# Altium PCB CNEPuckRevF.PcbDoc (part 2 of 2)
Units mil, origin at the board's own origin, x right, y up, seen from the top; angles counter-clockwise.
Board outline 3831.74 x 3902.47 mil, 4 copper layers (Top Layer, Internal Plane 1, Internal Plane 2, Bottom Layer); 165 components, 118 nets, 543 pads, 169 vias.
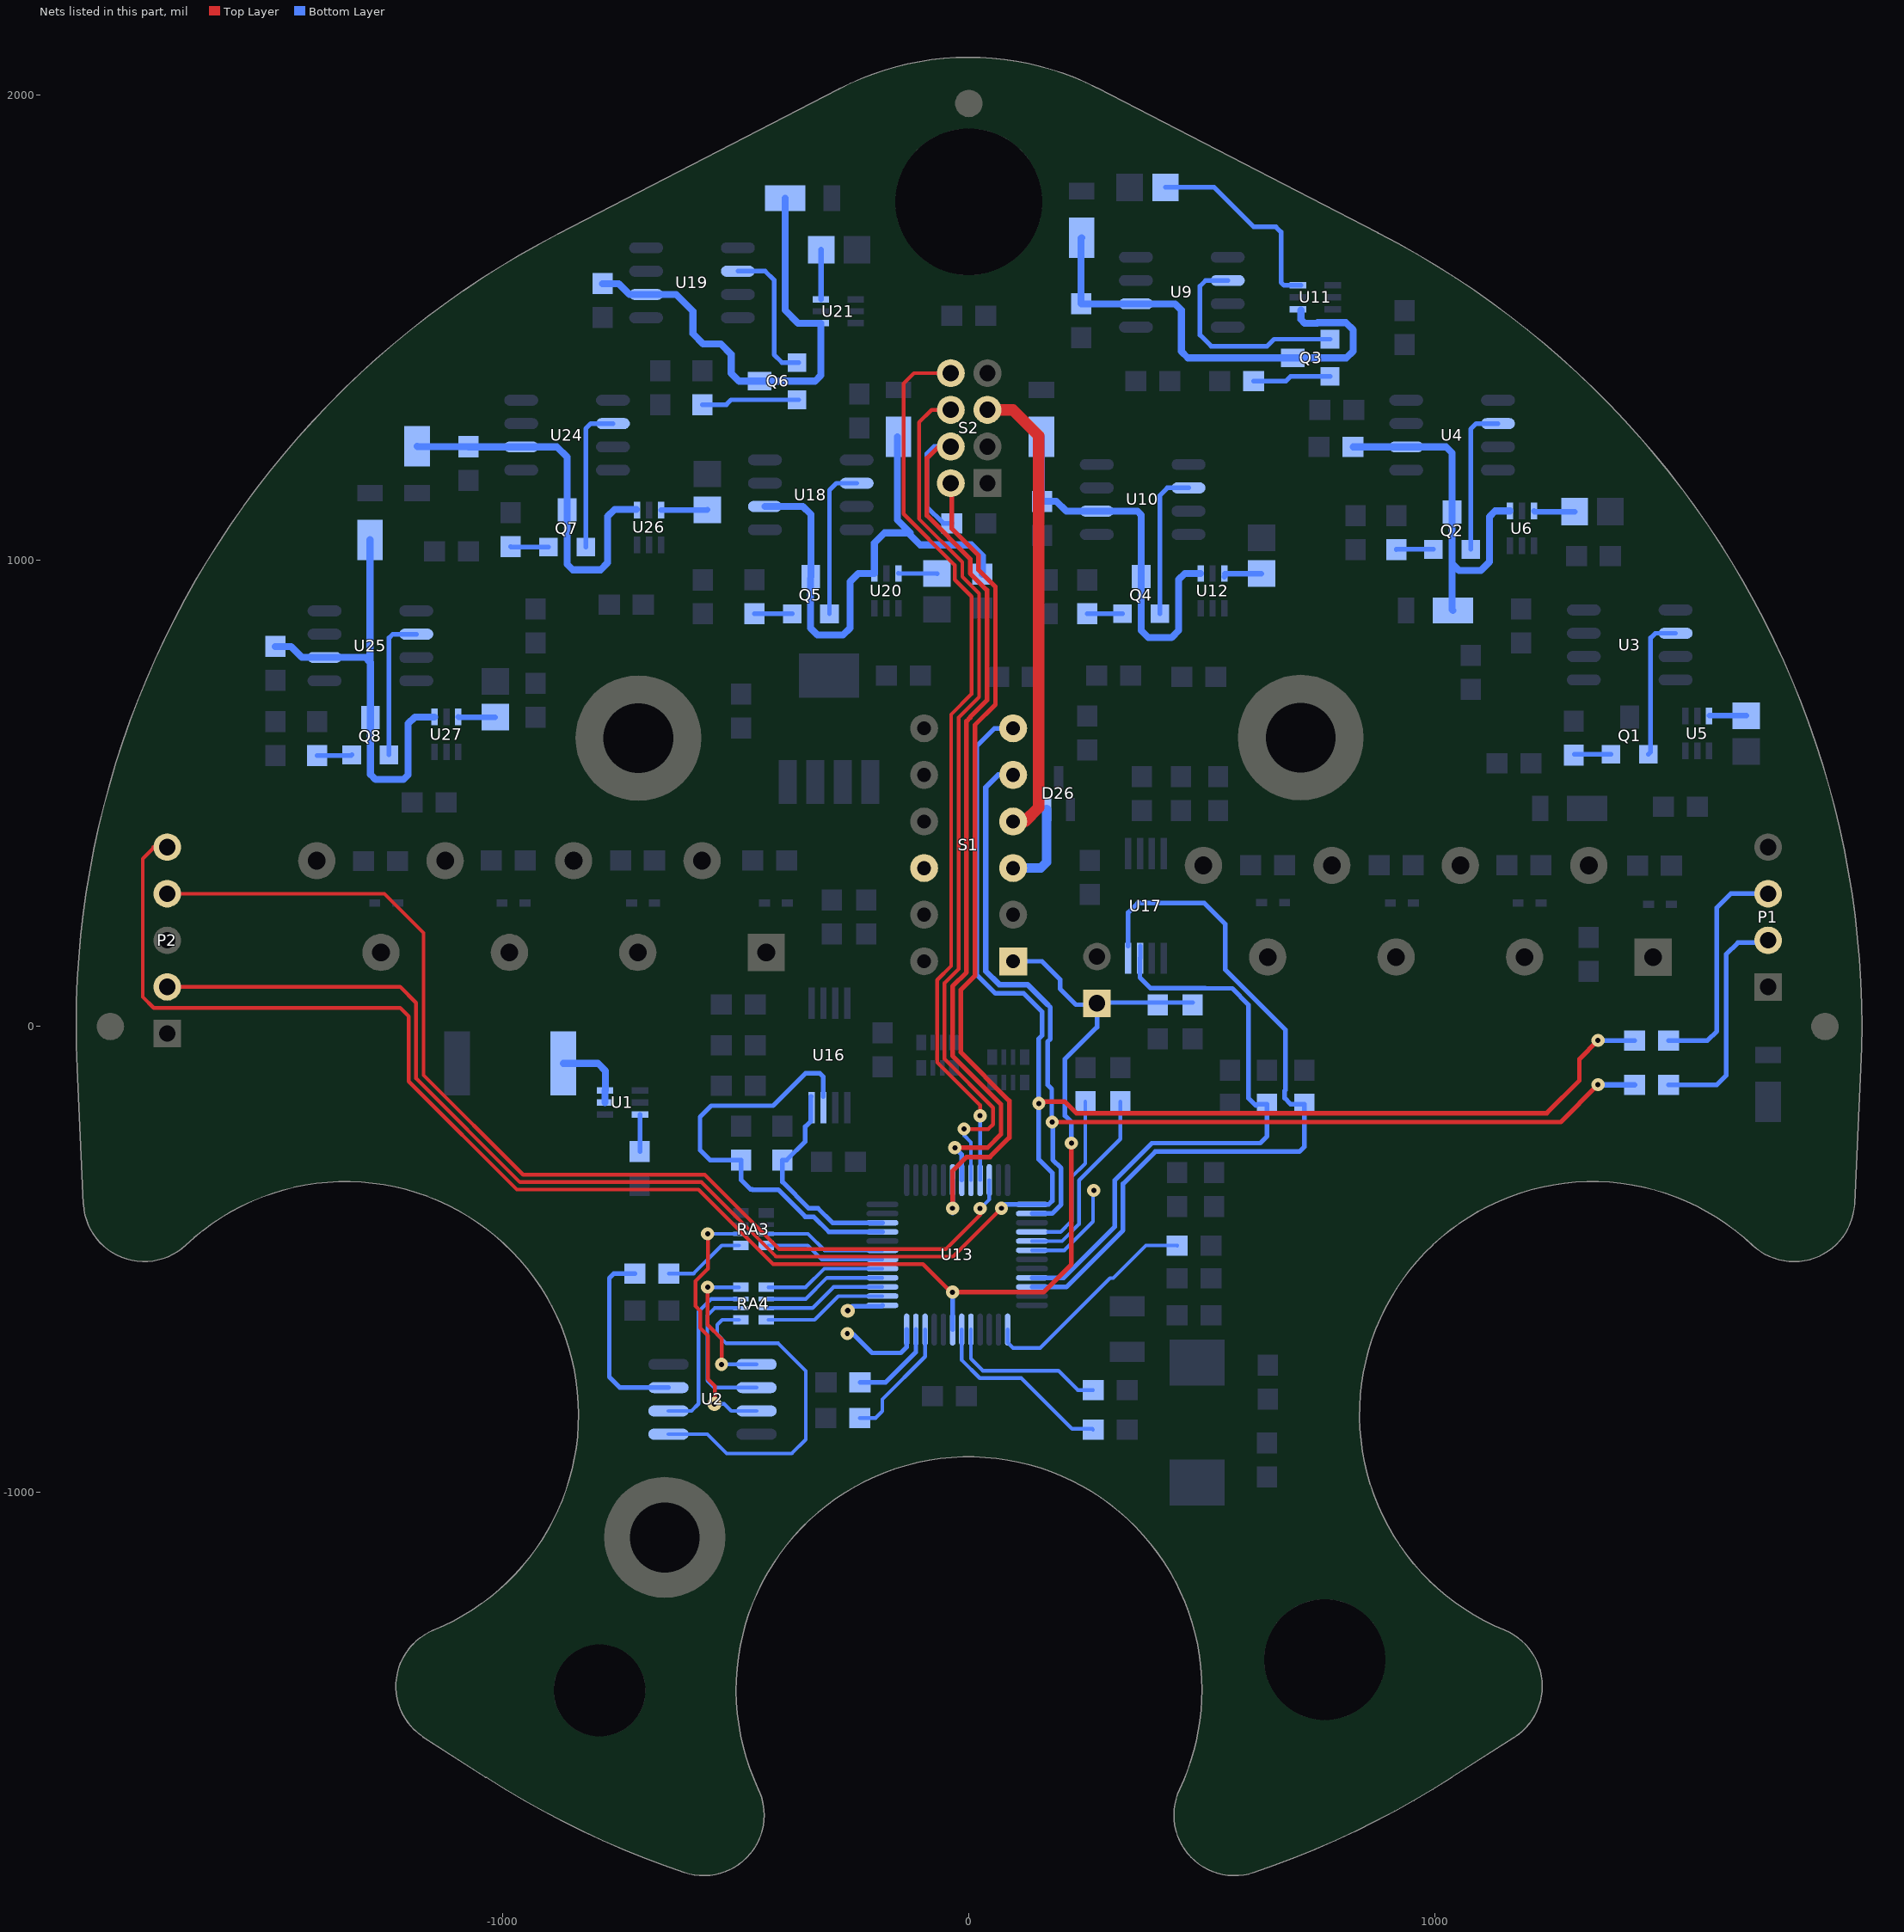
[diagram p4: the nets of this part, all layers, seen from the top]

## Via types
v1: diameter 28, hole 11, Top Layer to Bottom Layer, tented both sides, 158 vias
v2: diameter 30, hole 12, Top Layer to Bottom Layer, tented both sides, 6 vias
v3: diameter 50, hole 28, Top Layer to Bottom Layer, 4 vias
v4: diameter 28, hole 11, Top Layer to Bottom Layer, 1 vias

## Nets (pads, with @x,y where several pads share a name; then routed paths per layer and width w, separated by ;. In a path a pad name is that pad's centre, name@x,y a point inside that pad or via, vN(x,y) a via of type N, cw(c..) or ccw(c..) an arc to the next point about the centre after c; other vN are vias at no path point) (continued)
NetD19_2: D19.2 Q2.D R7.2 U4.2 U6.1 | length 796.8
  Bottom Layer w15: R7.2@824.42,1244 U4.2@938.57,1244 1024,1244 1037,1231 Q2.D@1037,1104 1037,994 ; D19.2@1038.42,893 1037,894.42 1037,994 ; U6.1@1161.41,1106.4 1129.4,1106.4 1117,1094 1117,997 1099,979 1052,979 1037,994
NetD20_2: D20.2 Q3.D R21.2 U9.2 U11.1 | length 1018.9
  Bottom Layer w15: D20.2@242,1692.58 241,1691.58 R21.2@241,1551.42 241.42,1551 U9.2@358.57,1551 443,1551 456,1538 456,1449 470,1435 Q3.D@695,1435 810,1435 824.42,1449.42 824.42,1494.99 808.91,1510.5 748.58,1510.5 747.49,1509.41 720.59,1509.41 712.6,1517.4 U11.1@712.6,1537.4
NetD21_2: D21.2 Q4.D R31.2 U10.2 U12.1 | length 866.2
  Bottom Layer w15: D21.2@156,1265.58 156,1128.42 157,1127.42 187.58,1127.42 209,1106 U10.2@274.57,1106 362,1106 370,1098 Q4.D@370,966 370,850 385,835 435,835 450,850 450,959 463.4,972.4 U12.1@497.41,972.4
NetD22_2: D22.2 Q5.D R37.2 U18.2 U20.1 | length 1190.6
  Bottom Layer w15: U18.2@-437.43,1116 -356,1116 -339,1099 Q5.D@-339,965.61 ; Q5.D@-340,961.61 -340,855 -325,840 -270,840 -255,855 -255,955 -237.57,972.43 U20.1@-202.59,972.43 -202.59,1037.93 -181.02,1059.5 -130,1059.5 ; D22.2@-153,1265.58 -153,1087 -125.5,1059.5 -130,1059.5 ; R37.2@29,970.42 29,1010 5.4,1033.6 -104.1,1033.6 -130,1059.5
NetD23_2: D23.2 Q6.D R32.2 U19.2 U21.1 | length 1053.7
  Bottom Layer w15: R32.2@-786,1594.42 -751.42,1594.42 -728,1571 U19.2@-692.43,1571 -628,1571 -592,1535 -592,1487 -570,1465 -532,1465 -510,1443 -510,1402 -493,1385 Q6.D@-449,1385 -330,1385 -317.4,1397.6 U21.1@-317.4,1509.41 -366.41,1509.41 -394.42,1537.42 D23.2@-394.42,1778
NetD24_2: D24.2 Q7.D R38.2 U24.2 U26.1 | length 827.9
  Bottom Layer w15: D24.2@-1184,1245.42 -1183,1244.42 R38.2@-1074,1244.42 -1073.58,1244 U24.2@-960.43,1244 -884,1244 -862,1222 -862,992 -850,980 -790,980 -775,995 -775,1095 -760,1110 U26.1@-713.19,1110
NetD25_2: D25.2 Q8.D R43.2 U25.2 U27.1 | length 982.9
  Bottom Layer w15: R43.2@-1488,815.42 -1454.42,815.42 -1431,792 U25.2@-1382.43,792 -1295,792 -1285,782 ; D25.2@-1285,1044.58 -1285,782 ; U27.1@-1146.59,664.4 -1188.6,664.4 -1203,650 -1203,540 -1213,530 -1273,530 -1284,541 Q8.D@-1284,663 -1284,781 -1285,782
NetP1_2: P1.2 R28.1 | length 494.3
  Bottom Layer w10: R28.1@1501.42,-125 1605,-125 1625,-105 1625,155 1650,180 1710,180 P1.2@1715,185
NetP1_3: P1.3 R26.1 | length 499.3
  Bottom Layer w10: R26.1@1501.42,-30 1585,-30 1605,-10 1605,255 1635,285 P1.3@1715,285
NetQ1_G: Q1.G U3.6 | length 309.6
  Bottom Layer w10: Q1.G@1458,584 1463,589 1463,834 1473,844 U3.6@1516.43,844
NetQ1_S: Q1.S R3.2 | length 78.6
  Bottom Layer w10: R3.2@1299.42,584 Q1.S@1378,584
NetQ2_G: Q2.G U4.6 | length 321.4
  Bottom Layer w10: Q2.G@1077,1024 1077,1282 1089,1294 U4.6@1135.43,1294
NetQ2_S: Q2.S R4.2 | length 80.2
  Bottom Layer w10: R4.2@917,1023.58 917.42,1024 Q2.S@997,1024
NetQ3_G: Q3.G U9.6 | length 464.6
  Bottom Layer w10: U9.6@555.43,1601 508,1601 496,1589 496,1484 520,1460 640,1460 655,1475 Q3.G@775,1475
NetQ3_S: Q3.S R9.2 | length 167.7
  Bottom Layer w10: R9.2@611.42,1385 680,1385 690,1395 Q3.S@775,1395
NetQ4_G: Q4.G U10.6 | length 322.1
  Bottom Layer w10: Q4.G@410,886 410,1140 426,1156 U10.6@471.43,1156
NetQ4_S: Q4.S R10.2 | length 76.2
  Bottom Layer w10: R10.2@254,885.58 254.42,886 Q4.S@330,886
NetQ5_G: Q5.G U18.6 | length 330
  Bottom Layer w10: Q5.G@-299,885.61 -299,1151 -284,1166 U18.6@-240.57,1166
NetQ5_S: Q5.S R33.2 | length 81.1
  Bottom Layer w10: R33.2@-460,885.89 -459.72,885.61 Q5.S@-379,885.61
NetQ6_G: Q6.G U19.6 | length 305.5
  Bottom Layer w10: U19.6@-495.57,1621 -437,1621 -418,1602 -418,1442 -401,1425 Q6.G@-365,1425
NetQ6_S: Q6.S R34.2 | length 211.3
  Bottom Layer w10: R34.2@-572,1334.58 -520.42,1334.58 -510,1345 Q6.S@-365,1345
NetQ7_G: Q7.G U24.6 | length 317
  Bottom Layer w10: Q7.G@-822,1029 -822,1283 -811,1294 U24.6@-763.57,1294
NetQ7_S: Q7.S R39.2 | length 81.2
  Bottom Layer w10: R39.2@-983,1029.58 -982.42,1029 Q7.S@-902,1029
NetQ8_G: Q8.G U25.6 | length 312.7
  Bottom Layer w10: Q8.G@-1244,583 -1244,834 -1236,842 U25.6@-1185.57,842
NetQ8_S: Q8.S R40.2 | length 74.6
  Bottom Layer w10: R40.2@-1398,581.58 -1325.42,581.58 Q8.S@-1324,583
NetR1_2: R1.2 U1.6 | length 80
  Bottom Layer w10: R1.2@-705.6,-268.58 U1.6@-705.6,-188.59
NetR2_1: R2.1 U1.2 U1.3 | length 164.9
  Bottom Layer w15: R2.1@-869.83,-79 -795.83,-79 -779.83,-95 -779.83,-136.83 U1.3@-780.4,-137.41 U1.2@-780.4,-163
NetR5_1: R5.1 U5.3 | length 78.8
  Bottom Layer w12: U5.3@1589.19,667 R5.1@1668,667
NetR6_1: R6.1 U6.3 | length 88
  Bottom Layer w12: U6.3@1212.59,1106.4 1213.99,1105 R6.1@1300,1105
NetR11_1: R11.1 U11.3 | length 441
  Bottom Layer w10: R11.1@422,1801 526.54,1801 611.27,1716.27 658.73,1716.27 670,1705 670,1597 676.41,1590.59 U11.3@712.6,1590.59
NetR12_1: R12.1 U12.3 | length 79.7
  Bottom Layer w12: U12.3@548.59,965.4 U12.3@549.19,966 ; U12.3@549.19,972 R12.1@628,972
NetR13_2: R13.2 U13.46 U17.4 | length 1641.7
  Bottom Layer w10: U13.46@135.43,-558.9 209.23,-558.9 330.85,-437.27 330.85,-337.55 400,-268.41 709.35,-268.41 720,-257.76 R13.2@720,-166.42 690.4,-166.42 677.61,-153.62 677.61,-137.94 679.12,-136.42 679.12,-6.8 550,122.33 550.04,122.37 550.04,220 505.04,265 362.2,265 341.73,244.53 341.73,173.05 U17.4@341.92,172.86
NetR14_2: R14.2 U13.45 U17.3 | length 1331.3
  Bottom Layer w10: U13.45@135.43,-539.21 203.46,-539.21 312.85,-429.82 312.85,-330.1 392.75,-250.21 625,-250.21 640,-235.21 R14.2@640,-166.42 619.96,-166.42 616.38,-170 600,-153.62 600,46.87 565,81.87 507.22,81.87 507.04,82.06 390,82.06 367.13,104.93 U17.3@367.13,146.65 ; U17.3@367.92,146.65 U17.3@367.92,172.86
NetR15_2: R15.2 U13.22 U16.4 | length 465.5
  Bottom Layer w10: U16.4@-338.39,-149.87 -339,-150.48 -339,-202.84 -351.07,-214.9 -351.07,-246.81 -390.88,-286.62 R15.2@-400,-286.62 -400,-333.71 -343.61,-390.1 -323.5,-390.1 -292.5,-421.1 U13.22@-185.43,-421.1
NetR16_2: R16.2 U13.21 U16.3 | length 908.8
  Bottom Layer w10: U16.3@-312.8,-149.87 -312.8,-107.2 -320,-100 -350,-100 -420,-170 -552.75,-170 -576.7,-193.95 -576.7,-265.11 -555.19,-286.62 R16.2@-488.42,-286.62 -488.42,-329.57 -468.8,-349.18 -464.79,-349.18 -463.81,-350.16 -409,-350.16 -351.07,-408.1 -332.96,-408.1 -300.27,-440.79 U13.21@-185.43,-440.79
NetR27_2: R27.2 U13.5 | length 352.4
  Bottom Layer w8: U13.5@4.53,-650.43 4.53,-713.06 30,-738.53 192.11,-738.53 233.58,-780 R27.2@266.59,-780
NetR29_1: R29.1 U13.6 | length 409
  Bottom Layer w8: U13.6@-15.16,-650.43 -15.16,-716 23.37,-754.53 112.53,-754.53 221.62,-863.62 265.22,-863.62 R29.1@266.59,-865
NetR30_1: R30.1 U13.1 | length 487.9
  Bottom Layer w8: U13.1@83.27,-650.43 83.27,-678.27 95,-690 153.08,-690 303.08,-540 309.88,-540 380,-469.88 447.09,-469.88 R30.1@447.2,-470
NetR35_1: R35.1 U20.3 | length 83.4
  Bottom Layer w10: U20.3@-151.41,972.43 R35.1@-68,972
NetR36_2: R36.2 U21.3 | length 106.7
  Bottom Layer w12: U21.3@-317.4,1560.59 -317.4,1666.37 R36.2@-316.77,1667
NetR41_1: R41.1 U26.3 | length 99.7
  Bottom Layer w12: U26.3@-660.41,1108.4 -561.6,1108.4 R41.1@-561,1109
NetR42_1: R42.1 U27.3 | length 79.6
  Bottom Layer w12: U27.3@-1095.41,664.4 -1095.01,664 R42.1@-1016,664
NetR44_2: R44.2 U2.3 | length 407.7
  Bottom Layer w10: R44.2@-716.42,-530 -761.42,-530 -771.42,-540 -771.42,-752.17 -748.58,-775 U2.3@-644.49,-775
NetRA3_3: RA3.3 U13.19 | length 259.2
  Bottom Layer w8: RA3.3@-430,-444.78 -345.2,-444.78 -309.83,-480.16 U13.19@-185.43,-480.16
NetRA3_4: RA3.4 U13.18 | length 257
  Bottom Layer w8: RA3.4@-430,-469.88 -345.56,-469.88 -315.6,-499.84 U13.18@-185.43,-499.84
NetRA4_1: RA4.1 U13.17 | length 261.1
  Bottom Layer w8: RA4.1@-430,-559.53 -350.19,-559.53 -310.19,-519.53 U13.17@-185.43,-519.53
NetRA4_2: RA4.2 U13.16 | length 263.4
  Bottom Layer w8: RA4.2@-430,-584.63 -349.83,-584.63 -304.41,-539.21 U13.16@-185.43,-539.21
NetRA4_3: RA4.3 U13.15 | length 263.4
  Bottom Layer w8: RA4.3@-430,-604.31 -335.41,-604.31 -290,-558.9 U13.15@-185.43,-558.9
NetRA4_4: RA4.4 U13.14 | length 265.6
  Bottom Layer w8: RA4.4@-430,-629.41 -330.83,-629.41 -280,-578.58 U13.14@-185.43,-578.58
NHOLD: RA3.6 U2.7 | length 558.3
  Top Layer w8: v1(-560.53,-444.78) -560,-445.31 -560,-520 -586.53,-546.53 -586.53,-600 -576.53,-610 -576.53,-646.55 -560,-663.08 -560,-756.42 -545,-771.42 -545,-809 v2(-546,-810)
  Bottom Layer w8: v1(-560.53,-444.78) RA3.6@-492.99,-444.78 ; v2(-546,-810) -525,-810 -510,-825 U2.7@-455.51,-825
NRESET_CNE: C8.2 P2.5 P3.1 R25.2 S1.1 U13.7 | length 3806
  Top Layer w8: -1750,385 -1750,382.48 -1772.48,360 -1772.48,63.45 -1749.03,40 -1220,40 -1220,39.77 -1202,21.77 -1202,-117.75 -969.75,-350 -580,-350 -420,-510 -98.52,-510 -38.52,-570 v1(-34.84,-570)
  Top Layer w10: v1(-34.84,-570) 160,-570 220,-510 v1(220,-250)
  Bottom Layer w10: U13.7@-34.84,-650.43 v1(-34.84,-570) ; S1.1@95,140 157.06,140 195.87,101.19 195.87,81 230,46.87 270.45,46.87 P3.1@274,50.42 ; v1(220,-250) 220,-205.41 206.1,-191.51 206.1,-69.8 273.8,-2.1 275,-2.1 275,49.42 P3.1@274,50.42 ; C8.2@480,51.42 403.58,51.42 275,51.42 P3.1@274,50.42
NWRITEPROTECT: R44.1 RA3.5 | length 175.5
  Bottom Layer w8: R44.1@-643.58,-530 -590.46,-530 -530.34,-469.88 RA3.5@-492.99,-469.88
POWER_IN: S1.7 S2.5 | length 998.4
  Top Layer w25: S2.5@40,1323.48 94.52,1323.48 150,1268 150,470 120,440 S1.7@95,440
SPARE_2: U13.42 | length 223.9
  Bottom Layer w8: U13.42@135.43,-480.16 205.06,-480.16 266.59,-418.62 266.59,-353.41 v4(268,-352)
SPARE_3: U13.12 | length 187.3
  Bottom Layer w10: v1(-260.81,-659.19) -260,-660 -248.27,-660 -207.8,-700.47 -145.88,-700.47 -133.27,-687.86 U13.12@-133.27,-650.43
SPARE_4: U13.13 | length 79.4
  Bottom Layer w10: v2(-260,-610) -250,-600 -187.17,-600 U13.13@-185.43,-598.27
SPI1_MISO: RA4.7 U2.2 | length 367.1
  Bottom Layer w8: U2.2@-644.49,-825 -595,-825 -580,-810 -580,-611.88 -552.75,-584.63 RA4.7@-492.99,-584.63
SPI1_MOSI: RA4.8 U2.5 | length 321.1
  Top Layer w8: v1(-560.53,-559.53) -560.53,-639.93 -530.46,-670 v1(-530.46,-725)
  Bottom Layer w8: v1@-561,-560 v1(-560.53,-559.53) RA4.8@-492.99,-559.53 ; v1(-530.46,-725) U2.5@-455.51,-725
SPI1_NSS: RA4.5 U2.1 | length 766
  Bottom Layer w8: U2.1@-644.49,-875 -561,-875 -519.58,-916.42 -380,-916.42 -349.83,-886.25 -349.83,-739.17 -409,-680 -520.46,-680 -540,-660.46 -540,-640 -529.41,-629.41 RA4.5@-492.99,-629.41
SPI1_SCK: RA4.6 U2.6 | length 326.2
  Bottom Layer w8: RA4.6@-492.99,-604.31 -545.31,-604.31 -561,-620 -561,-760 -546,-775 U2.6@-455.51,-775
SWDAT: P2.4 U13.34 | length 2352.4
  Top Layer w8: P2.4@-1720,285 -1254.04,285 -1170,200.96 -1170,-104.5 -956.5,-318 -566.75,-318 -407.01,-477.74 -49.23,-477.74 24.21,-404.3 v1(24.21,-390.67)
  Bottom Layer w8: v1(24.21,-390.67) 43.9,-370.99 U13.34@43.9,-329.57
USART1_CTS: S2.6 U13.32 | length 1894.8
  Top Layer w8: S2.6@-38.74,1323.48 -80,1323.48 -107,1296.48 -107,1089.63 -14,996.63 -14,965.5 22,929.5 22,707.04 -22,663.04 -22,123.37 -52,93.37 -52,-70 52,-174 52,-210 42,-220 v1(-10,-220)
  Bottom Layer w8: v1(-10,-220) -10,-233.85 4.53,-248.38 U13.32@4.53,-329.57
USART1_RTS: S2.8 U13.33 | length 1949.4
  Top Layer w8: S2.8@-38.74,1402.22 -117.78,1402.22 -140,1380 -140,1100 -30,990 -30,958.88 6,922.88 6,713.67 -38,669.67 -38,130 -68,100 -68,-76.62 24.21,-168.84 v1(24.21,-191.51)
  Bottom Layer w8: U13.33@24.21,-329.57 v1(24.21,-191.51)
USART1_RXD: R18.2 S2.4 U13.31 | length 2040.3
  Top Layer w10: S2.4@-65,1244.74 -90,1219.74 -90,1096.67 3,1003.67 3,972.54 39,936.54 39,700 3,664 3,663 -5,655 -5,116.33 -35,86.33 -35,-62.96 69,-166.96 69,-231 40,-260 v1(-30,-260)
  Bottom Layer w10: S2.4@-38.74,1244.74 -39,1245 -74.21,1245 -90.23,1228.99 -90.23,1115.43 -54.8,1080 R18.2@-36.42,1080 ; v1(-30,-260) -15.16,-274.84 U13.31@-15.16,-329.57
USART1_TXD: S2.2 U13.30 | length 1819.8
  Top Layer w10: S2.2@-38.74,1166 -36.44,1163.7 -36.44,1068.56 21,1011.12 21,980 57,944 57,691 13,647 13,108.88 -17,78.88 -17,-55.5 87,-159.5 87,-238.46 45.46,-280 -4.84,-280 -34.84,-310 v1(-34.84,-390)
  Bottom Layer w10: v1@-34.84,-400 v1(-34.84,-390) U13.30@-34.84,-329.57
USART2_RXD: R28.2 S1.9 U13.38 | length 2394.2
  Top Layer w10: v1(178.58,-205) 1270,-205 v1(1350,-125)
  Bottom Layer w10: U13.38@135.43,-401.42 178.58,-401.42 197.94,-382.06 197.94,-303.77 180,-285.83 v1@180,-206.42 ; 169,46.87 175,40.87 175,-26.77 169,-32.77 169,-125 178,-134 v1@178,-204.42
  Bottom Layer w12: 63.22,540 36.42,513.2 36.42,118.78 65.2,90 125.87,90 169,46.87 ; v1@178,-204.42 v1(178.58,-205) v1@180,-206.42 ; v1(1350,-125) R28.2@1428.58,-125
USART2_TXD_SWCLK: P2.2 R26.2 S1.11 U13.37 | length 4837.7
  Top Layer w8: P2.2@-1720,85 -1220,85 -1186,51 -1186,-111.12 -963.12,-334 -573.37,-334 -413.63,-493.74 -33.74,-493.74 v1(70,-390)
  Top Layer w10: v1@154,-161 205.59,-161 230.59,-186 1240,-186 1310,-116 1310,-70 v1(1350,-30)
  Bottom Layer w10: v1(70,-390) 78.27,-381.73 U13.37@135.43,-381.73 171.4,-381.73 178.94,-374.19 178.94,-313.94 150,-285 v1(150,-165) 150,-26.32 157,-19.32 157,32 118,71 57.33,71 17.42,110.91 17.42,602.42 55,640 S1.11@95,640 ; v1(1350,-30) R26.2@1428.58,-30
VBAT_SENSE: S1.6
VBAT_SW_SENSE: D26.2 S1.5 | length 190.2
  Bottom Layer w20: S1.5@95,340 154.42,340 167.03,352.61 D26.2@167.03,465.55
VER1: R23.1 U13.10 | length 267.6
  Bottom Layer w8: R23.1@-234.05,-840 -200,-840 -185.43,-825.43 -185.43,-800 -93.9,-708.46 U13.10@-93.9,-650.43
VER2: R24.1 U13.11 | length 195.2
  Bottom Layer w10: R24.1@-233.58,-763.58 -178.37,-763.58 -113.58,-698.8 U13.11@-113.58,-650.43
VER3: R20.1 U13.41 | length 415.4
  Bottom Layer w8: U13.41@135.43,-460.47 200,-460.47 236.61,-423.86 236.61,-330 325,-241.61 R20.1@325,-161.42
VER4: R22.1 U13.40 | length 328.4
  Bottom Layer w8: 170,-440.79 197.06,-440.79 220.61,-417.24 220.61,-323.37 250,-293.98 R22.1@250,-161.42
pads on no net: FD1.0 FD2.0 FD3.0 RA2.4 RA2.5 RA3.1 RA3.8 S1.4 U14.2

## Polygon pours and split planes (outlines as drawn)
GND on Top Layer "Top GND" (solid, remove dead copper, pour order 6): -1172.24,-1529.57 -1037.26,-1616.23 -1037.24,-1616.24 ccw(c0.48,0.2) -612.24,-1820.33 ccw(c-569.13,-1692.27) -434.01,-1692.27 ccw(c-569.13,-1692.27) -446.95,-1634.57 cw(c0.48,-1423.3) -446.96,-1634.55 cw(c0.48,-1423.3) 495.28,-1423.3 cw(c0.48,-1423.3) 447.91,-1634.57 ccw(c570.1,-1692.27) 613.2,-1820.33 ccw(c0.48,0.2) 1038.21,-1616.24 1173.2,-1529.57 ccw(c1100.21,-1415.87) 1235.33,-1415.87 ccw(c1100.21,-1415.87) 1151.25,-1290.76 cw(c1338.18,-832.62) 1151.23,-1290.75 cw(c1338.18,-832.62) 1622.23,-427.48 cw(c1338.18,-832.62) 1677.78,-472.77 cw(c1338.18,-832.62) 1677.8,-472.79 ccw(c1770.55,-374.52) 1905.52,-380.89 1919.22,-90.28 ccw(c1916.71,-90.15) 1919.22,-90.27 ccw(c0.48,0.2) 1921.36,0.2 ccw(c0.48,0.2) 881.5,1707.12 281.02,2017.06 281,2017.06 cw(c279.85,2014.83) 281.02,2017.06 281,2017.06 ccw(c0.48,1473.57) -280.04,2017.06 ccw(c-278.89,2014.83) -280.06,2017.06 -280.04,2017.06 -280.06,2017.06 -880.54,1707.12 ccw(c0.48,0.2) -1918.26,-90.27 ccw(c-1915.75,-90.15) -1918.26,-90.29 -1918.26,-90.27 ccw(c-1915.75,-90.15) -1918.26,-90.27 -1918.26,-90.29 -1904.56,-380.89 ccw(c-1902.05,-380.77) -1904.56,-380.89 ccw(c-1769.59,-374.52) -1676.84,-472.79 cw(c-1337.22,-832.62) -1676.82,-472.77 cw(c-1337.22,-832.62) -1621.26,-427.48 cw(c-1337.22,-832.62) -842.42,-832.62 cw(c-1337.22,-832.62) -1150.27,-1290.75 cw(c-1337.22,-832.62) -1150.29,-1290.76 cw(c-1149.34,-1293.08) -1150.27,-1290.75 -1150.29,-1290.76 ccw(c-1099.25,-1415.87)
GND on Bottom Layer "Bottom GND" (solid, remove dead copper, pour order 8): -1172.24,-1529.57 -1037.26,-1616.23 -1037.24,-1616.24 ccw(c0.48,0.2) -612.24,-1820.33 ccw(c-569.13,-1692.27) -434.01,-1692.27 ccw(c-569.13,-1692.27) -446.95,-1634.57 cw(c0.48,-1423.3) -446.96,-1634.55 cw(c0.48,-1423.3) 495.28,-1423.3 cw(c0.48,-1423.3) 447.91,-1634.57 ccw(c570.1,-1692.27) 613.2,-1820.33 ccw(c0.48,0.2) 1038.21,-1616.24 1173.2,-1529.57 ccw(c1100.21,-1415.87) 1235.33,-1415.87 ccw(c1100.21,-1415.87) 1151.25,-1290.76 cw(c1338.18,-832.62) 1151.23,-1290.75 cw(c1338.18,-832.62) 1622.23,-427.48 cw(c1338.18,-832.62) 1677.78,-472.77 cw(c1338.18,-832.62) 1677.8,-472.79 ccw(c1770.55,-374.52) 1905.52,-380.89 1919.22,-90.28 ccw(c1916.71,-90.15) 1919.22,-90.27 ccw(c0.48,0.2) 1921.36,0.2 ccw(c0.48,0.2) 881.5,1707.12 281.02,2017.06 281,2017.06 cw(c279.85,2014.83) 281.02,2017.06 281,2017.06 ccw(c0.48,1473.57) -280.04,2017.06 ccw(c-278.89,2014.83) -280.06,2017.06 -280.04,2017.06 -280.06,2017.06 -880.54,1707.12 ccw(c0.48,0.2) -1918.26,-90.27 ccw(c-1915.75,-90.15) -1918.26,-90.29 -1918.26,-90.27 ccw(c-1915.75,-90.15) -1918.26,-90.27 -1918.26,-90.29 -1904.56,-380.89 ccw(c-1902.05,-380.77) -1904.56,-380.89 ccw(c-1769.59,-374.52) -1676.84,-472.79 cw(c-1337.22,-832.62) -1676.82,-472.77 cw(c-1337.22,-832.62) -1621.26,-427.48 cw(c-1337.22,-832.62) -842.42,-832.62 cw(c-1337.22,-832.62) -1150.27,-1290.75 cw(c-1337.22,-832.62) -1150.29,-1290.76 cw(c-1149.34,-1293.08) -1150.27,-1290.75 -1150.29,-1290.76 ccw(c-1099.25,-1415.87)
GND on Internal Plane 1 (split plane): -870.83,1684.02 -870.19,1684.36
GND on Internal Plane 1 (split plane): 1119 vertices, not listed, extent -1895.39,-1802.37 1896.34,2060.18
CONSTANT_POWER on Internal Plane 2 (split plane): 189 vertices, not listed, extent -711.25,507.56 1603.66,1514.14
DQ_DEFIB on Internal Plane 2 (split plane): -870.83,1684.02 -870.19,1684.36
5V on Internal Plane 2 (split plane): 1160.1,-1508.03 1160.66,-1507.73 1160.8,-1507.67
DQ_DEFIB on Internal Plane 2 (split plane): 354 vertices, not listed, extent -1514.34,748.18 1742.51,2060.18
3.3V on Internal Plane 2 (split plane): 103.28,1394.62 103.28,1113.97 -58.25,952.45 -134.64,952.45 -136.6,952.19 -138.42,951.43 -139.99,950.23 -207.87,882.35 -209.07,880.78 -209.83,878.96 -210.09,877 -210.09,822.52 -210.09,795 -210.09,510.05 -209.83,508.09 -209.07,506.26 -207.87,504.7 -186.13,482.96 -186.13,108.57 -185.88,106.61 -185.12,104.79 -183.92,103.22 -25.35,-55.35 -23.78,-56.55 -21.96,-57.31 -20,-57.56 290,-57.56 291.96,-57.31 293.78,-56.55 295.35,-55.35 335.35,-15.35 336.55,-13.78 337.31,-11.96 337.56,-10 337.56,226.87 369.71,259.01 450.29,259.01 755.31,-46 755.31,-114 664.65,-204.65 663.45,-206.22 662.69,-208.04 662.44,-210 662.44,-567.02 662.44,-796.87 616.87,-842.44 -287.59,-842.44 -289.55,-842.69 -290.62,-843.14 -291.37,-843.45 -292.94,-844.65 -359.02,-910.74 -508.67,-910.74 -669.65,-749.75 -738.82,-680.58 -738.82,-509.42 -669.65,-440.25 -668.45,-438.68 -667.69,-436.86 -667.44,-434.9 -667.44,-315 -667.69,-313.04 -668.45,-311.22 -669.65,-309.65 -724.65,-254.65 -726.22,-253.45 -728.04,-252.69 -730,-252.44 -1558.45,-252.44 -1762.02,-48.86 -1762.02,21.87 -1751.45,32.44 -1675.49,32.44 -1449.11,-193.94 -1447.55,-195.14 -1445.72,-195.9 -1443.76,-196.16 -895.24,-196.16 -893.28,-195.9 -892.21,-195.45 -891.46,-195.14 -889.89,-193.94 -853.12,-157.17 -663.18,-157.17 -663.17,-157.17 -661.22,-156.91 -660.15,-156.47 -659.39,-156.16 -657.83,-154.96 -540.88,-38.01 -539.67,-36.44 -538.92,-34.61 -538.66,-32.66 -538.66,235.71 -538.35,235.95 -489.65,284.65 -488.45,286.22 -487.69,288.04 -487.44,290 -487.44,416.87 -424.65,479.65 -403.85,500.46 -402.16,500.23 -400.2,500.49 -398.37,501.25 -396.81,502.45 -395.6,504.01 -394.85,505.84 -394.59,507.8 -394.59,917.44 -295,917.44 -293.04,917.69 -291.22,918.45 -289.65,919.65 -195.44,1013.86 -194.24,1015.43 -193.48,1017.25 -193.22,1019.21 -193.22,1311.83 -63.8,1441.25 56.64,1441.25
5V on Internal Plane 2 (split plane): 947 vertices, not listed, extent -1895.39,-1802.37 1896.34,1743.42

## Keep-outs
Bottom Layer:
  lines w4: -1311,1100.05 -1311,1115.05 ; -1260,1100.05 -1260,1115.05 ; -1209,1175 -1209,1190 ; -1158,1175 -1158,1190 ; -339,1752 -324,1752 ; -339,1803 -324,1803 ; -177,1321 -177,1336 ; -126,1321 -126,1336 ; 130,1321 130,1336 ; 181,1321 181,1336 ; 217,1748 217,1763 ; 268,1748 268,1763 ; 968,867 983,867 ; 968,918 983,918 ; 1256,442 1271,442 ; 1256,493 1271,493
  lines w5: -1055,-145 -910,-145 ; -1055,-15 -910,-15
Keep-Out Layer:
  circle w9.84: c0.07,1767.38 r157.48
  circle w9.84: c763.54,-1358.65 r140
  circle w9.84: c-792.17,-1424.85 r140
  lines w9.84: -1869.18,144.93 cw(c18.02,-14.58) -850.64,1668.39 ; -1867.15,-159.76 ccw(c-1956.86,-6.99) -1865.22,144.64 ; -1856.67,-379 ccw(c-1771.4,-374.98) -1712.81,-437.06 cw(c-1339.03,-833.08) -815.29,-982.2 ; -859.55,1662.61 -259.05,1972.55 cw(c-1.35,1473.28) 256.34,1972.55 845.64,1668.39 cw(c-23.02,-14.58) 1864.18,144.93 ; -855.73,-1119.32 ccw(c-772.98,-1140.27) -811.28,-1216.56 ; -811.71,-1216.53 -638.67,-1292.38 ccw(c-604.18,-1214.29) -530.46,-1257.32 ; -477.67,-1159.85 cw(c-1.34,-1423.76) 491.09,-1656.27 ccw(c568.28,-1692.72) 595.51,-1773.63 ccw(c-1.34,-0.25) 1009.51,-1574.83 1144.51,-1488.16 ccw(c1098.39,-1416.32) 1130.64,-1337.28 cw(c1336.36,-833.08) 1710.14,-437.06 ccw(c1768.73,-374.98) 1854,-379 ; 1863.87,145.45 ccw(c1954.15,-6.99) 1864.96,-160.07
  lines w10: -1867.15,-159.76 -1856.67,-379 ; -855.73,-1119.32 -815.29,-982.2 ; -530.04,-1257.54 -477.67,-1159.85 ; 1854,-379 1864.96,-160.07
  lines w100: -1358,1230.53 cw(c-1188.82,1239.08) -1179.52,1408.22 ; -1020.67,-1521.65 ccw(c-821.36,-1469) -768.7,-1668.31 ; 721.19,-1682.78 ccw(c782.31,-1498.81) 959.46,-1577.54 ; 1240.05,1361.7 cw(c1235,1185) 1410,1210
  text "Keepout Layer" at 3135,-1860 h150

## Other copper
Top Layer:
  text "Top Copper Layer" at 3105,-535 h150
Bottom Layer:
  text "Bottom Copper Layer" at 4154,-995 h150
Internal Plane 1 (plane layer: these items are gaps in the copper):
  lines w100: -1358,1230.53 cw(c-1179.91,1230.13) -1179.52,1408.22 ; -1021.65,-1518.7 ccw(c-822.34,-1466.04) -769.69,-1665.35 ; 721.2,-1682.78 ccw(c787.7,-1511.03) 959.46,-1577.54 ; 1240.05,1361.7 cw(c1249.17,1200.88) 1410,1210
  text "Internal Plane 1 (GND)" at 3115,-685 h150
Internal Plane 2 (plane layer: these items are gaps in the copper):
  lines w7: -547,239.93 -546.23,239.16 ; 840,1105.59 840.29,1105.29 ; 1287.41,1028 1294.29,1021.12
  lines w15: -1528.54,1143.7 -1480.31,1095.47 -1415.83,1095.47 -1303.15,1095.47 -996.71,1401.91 -693.9,1704.72 -557.09,1704.72 -510.83,1750.98 -410.98,1750.98 -243.5,1750.98 -225.92,1733.4 -77.52,1585 -65,1585 77.13,1585 219.71,1727.59 242.13,1750 594.49,1750 710.63,1633.86 859.99,1633.86 969.03,1524.82 1002.08,1524.82 1100,1426.9 1100,1360.72 1185.72,1275 1217.05,1275 1324,1168.05 1440.87,1051.18 1462.24,1051.18 1607.08,906.34 1607.08,801.54 1668,740.62 1763.87,740.62 ; -546.23,239.16 -546.23,-32.66 -663.17,-149.61 -856.26,-149.61 -895.24,-188.59 -1443.76,-188.59 -1672.35,40 -1754.59,40 -1769.59,25 -1769.59,-51.99 -1561.58,-260 -730,-260 -675,-315 -675,-434.9 -746.38,-506.28 -746.38,-683.72 -675,-755.1 -511.8,-918.3 -355.89,-918.3 -287.59,-850 327.61,-850 ; -543.7,241.3 -495,290 -495,420 -430,485 -403.63,511.37 ; -402.16,507.8 -402.16,925 ; -202.52,822.52 -202.52,510.05 -178.57,486.09 -178.57,108.57 -20,-50 115,-50 290,-50 330,-10 330,230 366.58,266.58 453.42,266.58 762.87,-42.87 762.87,-117.13 670,-210 670,-567.02 670,-800 620,-850 320,-850 ; 840,1105.59 840,1234.67 840,1393.08 840,1472.28 840,1499.18 862.52,1521.7 886.76,1521.7 905.51,1502.95 905.51,1114.49 916.82,1103.18 960,1060 1213.2,1060 1255.41,1060 1290.85,1024.56 ; 840.29,1105.29 790,1055 614.58,1055 450,890.42 346.98,787.4 188.18,787.4 165.19,810.4 165.19,1412.57 73.82,1503.94 -206.06,1503.94 -275,1435 -275,1280.32 -275,1114.76 -386.81,1002.95 -597.72,1002.95 -704.59,1002.95 -718.81,988.73 -718.81,911.73 -700.79,893.7 -662.4,893.7 -631.1,925 -295,925 -200.79,1019.21 -200.79,1314.96 -66.93,1448.82 59.78,1448.82 110.84,1397.76 110.84,1110.84 -55.12,944.88 -134.64,944.88 -202.52,877 -202.52,795 -117.52,795 -86.61,825.91 -86.61,850.86 -71.33,866.14 34.86,866.14 52.78,848.22 52.78,777.22 150,680 240.58,680 456.42,680 557,780.58 776.42,1000 1039.37,1000 1255,784.37 1255,727.28 1482.28,500 1583.33,500 1611.22,527.89 1611.22,576.38 1587.6,600 1553.54,600 1294.29,859.25 1294.29,1021.12 ; 1845.69,448.82 1863.87,467
  lines w100: -1358,1230.53 cw(c-1179.91,1230.13) -1179.52,1408.22 ; -1020.37,-1521.65 ccw(c-825.49,-1468.5) -772.34,-1663.39 ; 721.2,-1682.78 ccw(c787.7,-1511.03) 959.46,-1577.54 ; 1240.05,1361.7 cw(c1243.41,1195.88) 1408.68,1209.89
  text "Internal Plane 2 (PWRs)" at 3115,-835 h150

## Silkscreen, mask and mechanical layers (free items; w line width, h text height)
Top Overlay:
  region: -821.05,1539.92 -300,1540 -300,1340 -919.15,1340.08 -1064.05,1340.92 -1064.05,1539.54 -919.15,1540.08 -870.05,1539.92
  lines w10: -1478,-291 -1478,-61 ; 425,-295 425,-64
  text "OPIsystems" at -1100,1114 h180
  text "CNE1-PCB" at -901.75,1029 h122
  text "REV F" at -1093.53,795 h122
  text "RST" at -1650,370 h30
  text "GND" at 1565,370 h30
  text "SWD" at -1650,270 h30
  text "TxD" at 1565,270 h30
  text "GND" at -1651,170 h30
  text "RxD" at 1565,165 h30
  text "TxD" at -1650,70 h30
  text "GND" at 1565,70 h30
  text "3V3" at -1645,-45 h30
  text "RESET_CNE" at 255,-50 h50 r270
  text "CH8-W" at -1331,-60 h100 r270
  text "CH6-W" at -779,-61 h100 r270
  text "CH5-W" at -504,-61 h100 r270
  text "CH7-W" at -1054,-62 h100 r270
  text "CH4-W" at 572,-64 h100 r270
  text "CH3-W" at 848,-65 h100 r270
  text "CH2-W" at 1123,-65 h100 r270
  text "CH1-W" at 1399,-66 h100 r270
  text "CH8-B" at -1435,-80 h100 r270
  text "CH7-B" at -1147.54,-80 h100 r270
  text "CH6-B" at -872.54,-80 h100 r270
  text "CH5-B" at -597.54,-80 h100 r270
  text "CH4-B" at 475,-80 h100 r270
  text "CH3-B" at 752.46,-80 h100 r270
  text "CH2-B" at 1027.46,-80 h100 r270
  text "CH1-B" at 1302.46,-80 h100 r270
  text "DEBUG" at 1592.52,-182.09 h50
  text "JTAG" at -1810,-215 h50
  text "Top Silkscreen Layer" at 3105,-395 h150
Bottom Overlay:
  lines w7: -830,-500 -830,-540 -770,-600 ; -343.47,-940 -330,-940 -280,-890 ; 90,1090 100,1100 100,1166 109,1175 212.98,1175 220,1182.02 220,1191.99 220,1245
  lines w9.84: -1868.95,146.83 cw(c-1956.86,-6.99) -1867.82,-160.16 ; -1868.54,146.8 cw(c17.09,-12.58) -850.85,1669 ; -1867,-160.12 -1856.69,-378.84 ccw(c-1771.42,-374.82) -1712.83,-436.9 cw(c-1339.05,-832.92) -815.35,-982.18 ; -878.85,1652.65 -259.05,1972.55 cw(c-1.35,1473.28) 256.34,1972.55 846.41,1667.99 cw(c-21.53,-13.58) 1864.1,145.79 ; -855.73,-1119.32 ccw(c-772.98,-1140.27) -811.28,-1216.56 ; -811.71,-1216.53 -638.67,-1292.38 ccw(c-604.18,-1214.29) -530.46,-1257.32 ; -478.31,-1160.81 cw(c-1.35,-1423.6) 491.07,-1656.11 ccw(c568.26,-1692.56) 595.49,-1773.47 ccw(c-1.35,-0.09) 1009.49,-1574.66 1144.49,-1488 ccw(c1098.37,-1416.16) 1130.62,-1337.12 cw(c1336.34,-832.92) 1710.12,-436.9 ccw(c1768.71,-374.82) 1853.98,-378.84 1864.3,-159.97 ; 1864.43,-159.76 cw(c1954.15,-6.99) 1864.51,145.83
  lines w10: -855.73,-1119.32 -815.29,-982.2 ; -530.04,-1257.54 -477.67,-1159.85 ; 226,220 226,111.75 237,100.75 315,100.75 335,80.75 335,80
  text "Bottom Silkscreen Layer" at 4304,-1145 h150
Top Paste:
  text "Top Paste Layer" at 3110,-1560 h150
Bottom Paste:
  text "Bottom Paste Layer" at 4085,-1710 h150
Mechanical 1:
  circle w5: c764.26,-1358.46 r129.92
  lines w5: -1911.12,-90.15 -1897.42,-380.77 ; -1910.76,-89.93 cw(c0.48,0.2) -877.08,1700.45 ; -1625.58,-421.33 ccw(c-1337.22,-832.62) -1682,-467.33 ; -1168.61,-1523.92 -1035.89,-1609.13 ; -1168.18,-1523.25 cw(c-1099.25,-1415.87) -1147.45,-1297.71 ccw(c-1337.22,-832.62) -1682,-467.33 ; -1033.19,-1609.91 ccw(c0.48,0.2) -609.84,-1813.21 ccw(c-569.13,-1692.27) -453.74,-1637.78 cw(c0.48,-1423.3) 454.7,-1637.78 ccw(c570.1,-1692.27) 610.8,-1813.21 ccw(c0.48,0.2) 1034.16,-1609.91 ; -879.38,1699.51 -278.89,2009.45 ; -276.59,2010.39 cw(c0.48,1473.57) 277.55,2010.39 ; 274.85,2012.02 875.35,1702.07 ; 878.04,1700.45 cw(c0.48,0.2) 1911.72,-89.93 ; 1034.85,-1609.13 1169.85,-1522.46 ; 1169.15,-1523.25 ccw(c1100.21,-1415.87) 1148.41,-1297.71 cw(c1338.18,-832.62) 1682.96,-467.33 ccw(c1770.55,-374.52) 1898.01,-380.53 ; 1897.95,-380.77 1911.66,-89.88 ; -1682,-467.32 cw(c-1769.59,-374.52) -1897.05,-380.53 ccw(c-1769.59,-374.52) -1682,-467.32
  text "Mechanical 1 Layer: Board Outline Layer" at 3110,-1270 h150
Mechanical 2:
  lines w4: -130,1480 170,1480
  lines w5: 3294.48,500.7 2934.48,500.7 ; 3294.48,780.7 2934.48,780.7 ; 3624.48,1210.7 2864.48,1210.7 2864.48,888.18 2869.09,887.27 2872.99,884.66 2875.6,880.75 2876.52,876.14 2875.6,871.53 2872.99,867.63 2869.09,865.02 2864.48,864.1 2864.48,848.03 2868.42,848.81 2873.02,847.9 2876.93,845.29 2879.54,841.38 2880.46,836.77 2879.54,832.16 2876.93,828.26 2873.02,825.65 2868.42,824.73 2864.48,825.51 2864.48,806.35 2867.74,808.53 2872.35,809.44 2876.96,808.53 2880.87,805.92 2883.48,802.01 2884.39,797.4 2883.48,792.79 2880.87,788.89 2876.96,786.28 2872.35,785.36 2867.74,786.28 2864.48,788.46 2864.48,769.29 2868.42,770.07 2873.02,769.16 2876.93,766.55 2879.54,762.64 2880.46,758.03 2879.54,753.42 2876.93,749.52 2873.02,746.91 2868.42,745.99 2864.48,746.77 2864.48,730.7 2869.09,729.79 2872.99,727.18 2875.6,723.27 2876.52,718.66 2875.6,714.05 2872.99,710.15 2869.09,707.54 2864.48,706.62 2864.48,330.7 3634.48,330.7 ; 2934.48,500.7 3124.48,470.7 3124.48,531.52 2934.48,500.7 ; 2934.48,780.7 3124.48,811.52 3124.48,750.7 2934.48,780.7
  lines w9.84: -1916.16,-90.49 cw(c0.07,-0.13) -879.8,1704.55 -279.3,2014.49 cw(c0.07,1473.24) 279.43,2014.5 879.93,1704.55 cw(c0.07,-0.13) 1916.3,-90.49 1884.47,-765.51 cw(c1276.04,-736.82) 1605.1,-1249.39 1036.43,-1614.46 cw(c0.07,-0.13) -1036.3,-1614.46 -1604.97,-1249.39 cw(c-1275.91,-736.82) -1884.34,-765.51 -1916.16,-90.49
  lines w10: -1296.76,1528.54 -1296.76,2013.24 -1040,2270 1640,2270 2280,1630 ; 1072.78,-1710 1070,-1710 2150,-1710 2280,-1580 2280,1630 ; 1500,1390 1740,1630 2280,1630 ; 2800,1630 2280,1630
  lines w15: -823.82,-1833.66 -620.08,-2037.4 1889.76,-2037.4 2150,-1777.17 2150,-1710
  text "IMPORTANT:" at 2919.99,1892.22 h150
  text "Please make sure that perferated edges of Mouse Bytes" at 2924.99,1707.22 h150
  text "are within the edge of the PCB - aka no jagged edges of" at 2924.99,1547.22 h150
  text "the byte can exist outside of the PCB edge." at 2930.68,1377.22 h150
  text "When panelizing this design please use Mouse Bites." at 3034.99,1077.22 h100
  text "This will place the ragged edge of the holes behind the edge of the PCB." at 3034.48,956.62 h100
  text "Mouse Bite" at 3324.48,753.42 h100
  text "Mechanical 2 Layer: Mouse Bites Panelization Details" at 2864.48,150.49 h150
Mechanical 4:
  text "PCB edge" at 3324.48,470.7 h100
Mechanical 5:
  lines w9.84: -51.11,488.92 -51.11,1677.15 51.25,1677.15 51.25,488.92 -51.11,488.92
Mechanical 6:
  circle w9.84: c0.07,1767.38 r157.48
  circle w9.84: c1337.76,-832.96 r302.19
  circle w9.84: c-1337.63,-832.96 r302.19
  circle w9.84: c0.07,-1423.64 r302.19
  circle w9.84: c-792.17,-1424.85 r129.92
  circle w9.84: c763.68,-1358.65 r129.92
  circle w9.84: c-711.93,619.96 r62.99
  circle w9.84: c712.07,619.96 r62.99
Mechanical 7:
  drawing of 1416 lines, arcs and shapes, not listed
  text "Cable Node Expander PCB" at -1050,-2320 h250
Mechanical 8:
  lines w9.84: -36.68,-275.63 -10.93,-275.63 -10.93,-224.63 -36.68,-224.63 ; -36.68,-175.63 -10.93,-175.63 -10.93,-124.63 -36.68,-124.63 ; -36.68,-75.63 -10.93,-75.63 -10.93,-24.63 -36.68,-24.63 ; -36.68,24.37 -10.93,24.37 -10.93,75.37 -36.68,75.37 ; -36.68,124.37 -10.93,124.37 -10.93,175.37 -36.68,175.37 ; -36.68,224.37 -10.93,224.37 -10.93,275.37 -36.68,275.37 ; 36.82,-275.63 11.07,-275.63 11.07,-224.63 36.82,-224.63 ; 36.82,-175.63 11.07,-175.63 11.07,-124.63 36.82,-124.63 ; 36.82,-75.63 11.07,-75.63 11.07,-24.63 36.82,-24.63 ; 36.82,24.37 11.07,24.37 11.07,75.37 36.82,75.37 ; 36.82,124.37 11.07,124.37 11.07,175.37 36.82,175.37 ; 36.82,224.37 11.07,224.37 11.07,275.37 36.82,275.37 ; 184.07,-320.13 189.07,-320.13 189.07,-275.23 ; 184.07,-275.23 189.07,-275.23 ; 184.07,-214.03 189.07,-214.03 ; 184.07,-169.13 189.07,-169.13 189.07,-214.03 ; 184.07,-166.58 189.07,-166.58 189.07,-96.18 ; 184.07,-96.18 189.07,-96.18 ; 184.07,-79.26 189.07,-79.26 ; 184.07,-62.33 189.07,-62.33 ; 184.07,8.07 189.07,8.07 189.07,-62.33 ; 184.07,20.22 189.07,20.22 189.07,102.52 ; 184.07,102.52 189.07,102.52 ; 184.07,156.42 189.07,156.42 189.07,102.52 ; -96.68,-410.13 ccw(c-96.68,-350.13) -36.68,-350.13 ; -96.68,-410.13 96.82,-410.13 ; -96.68,-410.13 -96.68,-382.13 ; -96.68,-382.13 -75.93,-382.13 -75.93,-318.13 -96.68,-318.13 ; -96.68,-382.13 -139.93,-382.13 -139.93,-318.13 -96.68,-318.13 ; -96.68,-318.13 -96.68,319.91 ; -96.68,319.91 ccw(c-107.93,349.87) -96.68,379.83 ; -96.68,319.91 cw(c-107.93,349.87) -96.68,379.83 ; -96.68,379.82 -96.68,409.87 ; -96.68,409.87 cw(c-96.68,349.87) -36.68,349.87 ; -96.68,409.87 96.82,409.87 ; -36.68,-350.13 36.82,-350.13 ; -36.68,-350.13 -36.68,349.87 ; -36.68,349.87 36.82,349.87 ; 36.82,-350.13 ccw(c96.82,-350.13) 96.82,-410.13 ; 36.82,-350.13 36.82,349.87 ; 36.82,349.87 cw(c96.82,349.87) 96.82,409.87 ; 96.82,-410.13 96.82,409.87 ; 189.07,-275.23 189.07,-214.03 ; 189.07,-96.18 189.07,-79.26 ; 189.07,-79.26 189.07,-62.33 ; -183.93,-400.13 ccw(c-153.93,-400.13) -153.93,-430.13 154.07,-430.13 ccw(c154.07,-400.13) 184.07,-400.13 184.07,399.87 ccw(c154.07,399.87) 154.07,429.87 -153.93,429.87 ccw(c-153.93,399.87) -183.93,399.87 -183.93,-400.13
Mechanical 9:
  drawing of 387 lines, arcs and shapes, not listed
Mechanical 11:
  drawing of 724 lines, arcs and shapes, not listed
  text "CableNode Expander - Rev. F" at 8654.19,7365.74 h50
  text "DESIGN INFORMATION" at 6449.19,7360.74 h60
  text "BOARD NAME:" at 7929.19,7360.74 h60
  text "BOARD TECHNOLOGY" at 6449.19,7260.74 h60
  text "BOARD SIZE (REFER ALSO PROFILING INFORMATION)" at 8349.19,7260.74 h50
  text "xx.xx" at 8653.13,7171.21 h60
  text "28.000" at 7071.2,7167.75 h60
  text "yy.yy" at 9558.64,7167.28 h60
  text "0.008" at 7621.2,7162.75 h60
  text "0.008" at 6560.45,7160.74 h60
  text "(Unit)" at 10191.31,7158.46 h60
  text "X" at 9281.04,7140.74 h70
  text "(MIN. TRACK/   PADS  /CLEARANCE IN 0.001'')" at 6389.19,7060.74 h50
  text "MINIMUM ANNULAR RING 0.05MM (0.002'') EXTERNAL PER IPC-2221 CLASS 3 LEVEL C AND IS THE" at 6449.19,6960.74 h50
  text "MANUFACTURING REGISTRATION ALLOWANCE" at 6449.19,6870.74 h50
  text "LAND SIZE CALCULATION MINIMUM - NOMINAL HOLE SIZE + 0.508MM (0.020'')" at 6449.19,6760.74 h50
  text "AS INSTRUCTED" at 9836.2,6587.75 h60
  text "X" at 7931.2,6582.75 h60
  text "CIRCUIT TYPE:" at 6449.19,6580.74 h60
  text "SS" at 7349.19,6580.74 h50
  text "DS" at 8049.19,6580.74 h50
  text "X" at 8624.19,6580.74 h60
  text "PTH" at 8749.19,6580.74 h50
  text "ML" at 9179.19,6580.74 h50
  text "X" at 9329.19,6580.74 h60
  text "No. OFF" at 9449.19,6580.74 h50
  text "FINGER CONNECTOR DIM PER:" at 6449.19,6460.74 h60
  text "AS SHOWN" at 9449.19,6460.74 h50
  text "No. OFF TOTAL" at 7109.19,6350.74 h60
  text "ONE SIDE" at 8749.19,6350.74 h50
  text "BOTH SIDES" at 9449.19,6340.74 h50
  text "VIAS:" at 6449.19,6235.74 h60
  text "NONE" at 6899.19,6235.74 h45
  text "X" at 7229.19,6235.74 h60
  text "FEED THRU'" at 7349.19,6235.74 h45
  text "X" at 7929.19,6235.74 h60
  text "TENTED" at 8049.19,6235.74 h45
  text "BURIED LAYER SEQUENCE" at 8749.19,6235.74 h45
  text "UNIQUE DRILL" at 7349.19,6115.74 h45
  text "2 SIZE" at 8049.19,6115.74 h45
  text "BLIND LAYER SEQUENCE" at 8749.19,6115.74 h45
  text "Layer Stack Manager (Altium)" at 7844.19,6025.74 h50
  text "X" at 9329.19,6025.74 h60
  text "AS SHOWN" at 9449.19,6025.74 h50
  text "LAYER CONSTRUCTION PER:" at 6449.19,6020.74 h60
  text "Altium" at 9639.19,5920.74 h50
  text "(PFW)" at 10044.19,5915.74 h50
  text "ARTWORK:" at 6449.19,5910.74 h60
  text "MANUAL" at 7349.19,5910.74 h50
  text "DIGITISED" at 8049.19,5910.74 h50
  text "X" at 8629.19,5910.74 h60
  text "CAD" at 8749.19,5910.74 h50
  text "TYPE" at 9179.19,5910.74 h50
  text "ARTWORK/PATTERN MASTER LIST" at 6449.19,5725.74 h60
  text "DESCRIPTION" at 6499.19,5630.74 h50
  text "DRAWING No./CAD FILE REF." at 7234.19,5630.74 h50
  text "LAYER NAME" at 8859.19,5630.74 h50
  text "GERBER FILE REF" at 9676.2,5627.75 h50
  text "PCB FILE" at 6438.01,5533.73 h50
  text "CNEPuckRevF" at 7240.02,5530.74 h50
  text "PcbDoc" at 8470.02,5530.74 h40
  text "Bottom Layer" at 8792.02,5433.73 h40
  text "GBL" at 10470.02,5430.74 h50
  text "CNEPuckRevF" at 7240.02,5430 h50
  text "CNEPuckRevF" at 9752.09,5430 h50
  text "GERBER FILE" at 6438.01,5428.73 h50
  text "GBO" at 10468.01,5332.75 h50
  text "Bottom Overlay" at 8792.02,5331.72 h40
  text "CNEPuckRevF" at 7240.02,5330 h50
  text "GERBER FILE" at 6438.01,5328.73 h50
  text "CNEPuckRevF" at 9752.09,5324.75 h50
  text "Bottom Paste Mask" at 8792.02,5235.74 h40
  text "GBP" at 10470.02,5230.74 h50
  text "CNEPuckRevF" at 7240.02,5230 h50
  text "GERBER FILE" at 6438.01,5228.73 h50
  text "CNEPuckRevF" at 9752.09,5227.74 h50
  text "Bottom Solder Mask" at 8790.08,5137 h40
  text "CNEPuckRevF" at 9752.09,5137 h50
  text "GBS" at 10470.02,5130.74 h50
  text "GERBER FILE" at 6438.01,5128.73 h50
  text "CNEPuckRevF" at 7240.02,5128.73 h50
  text "Drill Drawing" at 8792.02,5036.09 h40
  text "GD1" at 10470.02,5033.1 h50
  text "CNEPuckRevF" at 9752.09,5030 h50
  text "GERBER FILE" at 6438.01,5028.73 h50
  text "CNEPuckRevF" at 7242.09,5028.73 h50
  text "Mechanical Layer 11" at 8792.02,4938.1 h40
  text "CNEPuckRevF" at 9752.09,4933.1 h50
  text "GM11" at 10470.02,4933.1 h50
  text "GERBER FILE" at 6438.01,4928.73 h50
  text "CNEPuckRevF" at 7242.09,4928.73 h50
  text "Mechanical Layer 1" at 8792.09,4845 h40
  text "GERBER FILE" at 6432.09,4835 h50
  text "CNEPuckRevF" at 7242.09,4835 h50
  text "CNEPuckRevF" at 9752.09,4830 h50
  text "GM1" at 10472.09,4825 h50
  text "Internal Plane 1" at 8792.02,4738.1 h40
  text "GP1" at 10470.02,4733.1 h50
  text "CNEPuckRevF" at 7240.02,4730 h50
  text "CNEPuckRevF" at 9752.09,4730 h50
  text "GERBER FILE" at 6438.01,4728.73 h50
  text "Internal Plane 2" at 8792.02,4636.09 h40
  text "GP2" at 10470.02,4633.1 h50
  text "CNEPuckRevF" at 7240.02,4630 h50
  text "CNEPuckRevF" at 9752.09,4630 h50
  text "GERBER FILE" at 6438.01,4628.73 h50
  text "Bottom Pad Master" at 8792.02,4536.88 h40
  text "GBP" at 10470.02,4533.89 h50
  text "CNEPuckRevF" at 7242.09,4530 h50
  text "GERBER FILE" at 6438.01,4528.73 h50
  text "CNEPuckRevF" at 9754.09,4525.89 h50
  text "Top Pad Master" at 8792.02,4431.88 h40
  text "CNEPuckRevF" at 7242.09,4430 h50
  text "CNEPuckRevF" at 9752.09,4430 h50
  text "GTP" at 10468.01,4430 h50
  text "GERBER FILE" at 6439.19,4427 h50
  text "Top Layer" at 8792.02,4336.88 h40
  text "CNEPuckRevF" at 7242.09,4330 h50
  text "CNEPuckRevF" at 9752.09,4330 h50
  text "GTL" at 10468.01,4330 h50
  text "GERBER FILE" at 6441.19,4327 h50
  text "Top Overlay" at 8792.02,4231.72 h40
  text "CNEPuckRevF" at 9752.09,4230 h50
  text "GTO" at 10472.09,4230 h50
  text "GERBER FILE" at 6441.19,4227 h50
  text "CNEPuckRevF" at 7242.09,4227 h50
  text "Top Paste Mask" at 8792.02,4135.74 h40
  text "CNEPuckRevF" at 7240.02,4130 h50
  text "CNEPuckRevF" at 9752.09,4130 h50
  text "GTP" at 10468.01,4130 h50
  text "GERBER FILE" at 6441.19,4127 h50
  text "Top Solder Mask" at 8792.02,4037 h40
  text "CNEPuckRevF" at 9752.09,4030 h50
  text "GTS" at 10468.01,4030 h50
  text "GERBER FILE" at 6441.19,4027 h50
  text "CNEPuckRevF" at 7240.02,4027 h50
  text "Aperture List" at 8792.02,3937 h40
  text "CNEPuckRevF" at 7242.09,3930 h50
  text "CNEPuckRevF" at 9754.09,3930 h50
  text "APR" at 10468.01,3930 h50
  text "APERTURE LIST" at 6439.19,3927 h50
  text "Drill Report" at 8792.02,3837 h40
  text "CNEPuckRevF" at 9754.09,3837 h50
  text "CNEPuckRevF" at 7242.09,3830 h50
  text "DRR" at 10464.09,3830 h50
  text "DRILL REPORT" at 6441.19,3827 h50
  text "Excellon Drill Report" at 8790.08,3737 h40
  text "CNEPuckRevF" at 9754.09,3730 h50
  text "RUL" at 10464.09,3730 h50
  text "EXCELLON DRILL" at 6441.19,3727 h50
  text "CNEPuckRevF" at 7242.09,3727 h50
  text "CNEPuckRevF" at 7242.09,3630 h50
  text "ReadMe" at 9762.09,3630 h50
  text "TXT" at 10462.02,3630 h50
  text "GENERAL INFO" at 6441.19,3627 h50
  text "Readme Text File" at 8792.02,3627 h40
  text "Mechanical Layer 2" at 8784.02,3540 h40
  text "GERBER FILE" at 6433.19,3530 h50
  text "CNEPuckRevF" at 7240,3530 h50
  text "CNEPuckRevF" at 9750,3530 h50
  text "GM2" at 10460,3530 h50
  text "MATERIAL:" at 6449.19,3320.74 h60
  text "GLASS FIBRE EPOXY RESIN NEMA GRADE FR4 (MIL-S-13949H)" at 7459.19,3310.74 h50
  text "X" at 7354.19,3305.74 h60
  text "THICKNESS:" at 6759.19,3195.74 h50
  text "0.031\"" at 7459.19,3195.74 h50
  text "0.062\"" at 8154.19,3195.74 h50
  text "0.093" at 8849.19,3195.74 h50
  text "0.125" at 9549.19,3195.74 h50
  text "X" at 8050.08,3187.74 h60
  text "TOLERANCE:" at 6754.19,3075.74 h50
  text "IN A/W IPC-D-300G CLASS" at 7449.19,3075.74 h50
  text "3 LEVEL B" at 8824.19,3075.74 h50
  text "OTHER +/-" at 9549.19,3075.74 h50
  text "X" at 7354.19,3070.74 h60
  text "BOW & TWIST:" at 6659.19,2955.74 h50
  text "IN A/W IPC-D-300G CLASS" at 7449.19,2955.74 h50
  text "3 LEVEL B" at 8824.19,2955.74 h50
  text "AS SHOWN" at 9554.19,2950.74 h50
  text "X" at 7354.19,2945.74 h60
  text "COPPER THICKNESS (FINISHED)" at 6754.19,2825.74 h50
  text "OUTER:" at 6944.19,2735.74 h50
  text "18um" at 7459.19,2735.74 h50
  text "35um" at 8524.19,2735.74 h50
  text "70um" at 9559.19,2735.74 h50
  text "X" at 8416.2,2727.75 h60
  text "INNER SIGNAL:" at 6614.19,2615.74 h50
  text "18um" at 7459.19,2615.74 h50
  text "35um" at 8524.19,2615.74 h50
  text "70um" at 9559.19,2615.74 h50
  text "X" at 8417.2,2606.75 h60
  text "INNER PWR:" at 6759.19,2495.74 h50
  text "18um" at 7459.19,2495.74 h50
  text "35um" at 8524.19,2495.74 h50
  text "70um" at 9559.19,2495.74 h50
  text "X" at 8416.2,2485.75 h60
  text "STRUCTURE:" at 6449.19,2375.74 h60
  text "REFER" at 7459.19,2375.74 h50
  text "AS PER DRAWING No." at 7454.19,2250.74 h50
  text "AS SHOWN" at 9554.19,2250.74 h50
  text "X" at 9454.19,2245.74 h60
  text "DRILLING:" at 6449.19,2140.74 h60
  text "VIEWED FROM:" at 6644.19,2050.74 h50
  text "COMPONENT SIDE" at 7459.19,2050.74 h45
  text "SOLDER SIDE" at 8514.19,2050.74 h45
  text "X" at 7354.19,2040.74 h60
  text "REFERENCE:" at 6734.19,1930.74 h50
  text "AS SHOWN" at 7454.19,1925.74 h45
  text "PATTERN MASTER LIST" at 8519.19,1925.74 h45
  text "X" at 9454.19,1925.74 h60
  text "NC_DRILL FILES" at 9554.19,1925.74 h45
  text "X" at 7354.19,1920.74 h60
  text "PTH MINIMUM COPPER THICKNESS:" at 6964.19,1810.74 h50
  text "20um" at 8524.19,1810.74 h50
  text "X" at 8419.19,1805.74 h60
  text "OTHER" at 9554.19,1805.74 h50
  text "NPTH:" at 6984.19,1690.74 h50
  text "TENTED" at 7454.19,1685.74 h45
  text "X" at 8419.19,1685.74 h60
  text "PADS REMOVED" at 8519.19,1685.74 h45
  text "REMOVE PADS" at 9554.19,1685.74 h45
  text "X" at 7354.19,1680.74 h60
  text "2nd DRILL" at 7454.19,1565.74 h45
  text "BOTH" at 8519.19,1565.74 h45
  text "AS SHOWN" at 9004.19,1565.74 h45
  text "NONE" at 9554.19,1565.74 h45
  text "BOARD FINISH:" at 6449.19,1450.74 h60
  text "X" at 7354.19,1445.74 h60
  text "ETCHING" at 7454.19,1445.74 h45
  text "REFER PATTERN MASTER LIST" at 8519.19,1445.74 h45
  text "LEGEND / SCREEN PRINT:" at 7249.19,1330.74 h50
  text "NONE" at 8519.19,1325.74 h45
  text "COMPONENT" at 9004.19,1325.74 h45
  text "SOLDER" at 9554.19,1325.74 h45
  text "X" at 8904.19,1320.74 h60
  text "X" at 9454.19,1320.74 h60
  text "COLOUR:" at 6864.19,1210.74 h50
  text "WHITE" at 7454.19,1205.74 h45
  text "YELLOW" at 8519.19,1205.74 h45
  text "OTHER" at 9554.19,1205.74 h45
  text "X" at 7354.19,1200.74 h60
  text "X" at 7354.19,1085.74 h60
  text "LIQUID PHOTOIMAGEABLE" at 7454.19,1085.74 h45
  text "SCREEN PRINT" at 9004.19,1085.74 h45
  text "MATTE" at 7454.19,965.74 h45
  text "GLOSS" at 7954.19,965.74 h45
  text "GREEN" at 8519.19,965.74 h45
  text "BLUE" at 9004.19,965.74 h45
  text "G/Y" at 9554.19,965.74 h45
  text "OTHER" at 10004.19,965.74 h45
  text "X" at 7849.19,960.74 h60
  text "SOLDER MASK COLOUR:" at 6449.19,850.74 h45
  text "BLACK" at 7454.19,845.74 h45
  text "GREEN" at 7954.19,845.74 h45
  text "YELLOW" at 8519.19,845.74 h45
  text "BLUE" at 9004.19,845.74 h45
  text "OTHER" at 9554.19,845.74 h45
  text "X" at 7848.08,841 h60
  text "TRACK FINISH:" at 6449.19,730.74 h60
  text "SELECTIVE SOLDER (HASL)" at 7454.19,725.74 h45
  text "REFLOW SOLDER" at 9004.19,725.74 h45
  text "X" at 7351.24,722.79 h60
  text "SELECTIVE GOLD" at 7454.19,605.74 h45
  text "um  (AREA" at 8519.19,605.74 h45
  text "sq. mm)" at 9614.19,605.74 h45
  text "REFER PATTERN MASTER LIST" at 7454.19,485.74 h45
  text "OTHER" at 9004.19,485.74 h45
  text "EDGE BOARD" at 6449.19,370.74 h60
  text "1.3um HARD GOLD OVER 5um     NICKEL / TIN-NICKEL" at 7454.19,365.74 h45
  text "CONTACTS:" at 6449.19,285.74 h60
  text "HARD FINISH GOLDE PLATE" at 7454.19,245.74 h45
  text "OTHER" at 9004.19,245.74 h45
  text "AS SHOWN" at 7454.19,125.74 h45
  text "REFER" at 9004.19,125.74 h45
  text "X" at 7355,120 h60
  text "PROFILING:" at 6449.19,5.74 h60
  text "AS DIMENSIONED, MEASURED AND CUT FROM SPECIFIED DATUM." at 7454.19,5.74 h45
  text "X" at 7354.19,0.74 h60
  text "REFER PCB BLANK DWG No." at 7459.19,-109.26 h50
  text "USE PROFILE / ROUTE TAPE SUPPLIED (REFER PATTERN MASTER LIST)" at 7459.19,-229.26 h50
  text "SQUARE CUT" at 7459.19,-349.26 h50
  text "N.C. ROUTE" at 8159.19,-349.26 h50
  text "V. SCORE" at 8859.19,-349.26 h50
  text "BLANK" at 9559.19,-349.26 h50
  text "ACCEPTABILITY:" at 6449.19,-454.26 h60
  text "MATERIALS AND WORKMANSHIP FOR ALL PRINTED WIRING BOARDS TO MEET" at 7324.19,-459.26 h50
  text "OR EXCEED THE REQUIREMENTS OF:" at 7324.19,-569.26 h50
  text "IPC-6011/12 AND IPC-A-600E" at 7464.19,-674.26 h50
  text "1" at 8864.19,-674.26 h50
  text "2" at 9214.19,-674.26 h50
  text "X" at 9109.19,-679.26 h60
  text "X" at 7359.19,-684.26 h60
  text "3" at 9564.19,-759.26 h50
  text "UL CERTIFICATION" at 7464.19,-794.26 h50
  text "AUSTEL" at 8864.19,-794.26 h50
  text "X" at 7359.19,-799.26 h60
  text "ML-P-55110F GRP" at 7444.19,-914.26 h40
  text "A" at 8164.19,-914.26 h50
  text "B" at 8514.19,-914.26 h50
  text "AS2546" at 8864.19,-914.26 h50
  text "OTHER" at 9564.19,-914.26 h50
  text "ADDITIONAL" at 6449.19,-1029.26 h60
  text "NONE" at 7464.19,-1039.26 h50
  text "SAMPLE PLAN" at 8164.19,-1039.26 h50
  text "MIL-P-55110E SERIAL Nos. PER ORDER" at 8864.19,-1039.26 h50
  text "REQUIREMENTS:" at 6449.19,-1124.26 h60
  text "NONE" at 7464.19,-1159.26 h50
  text "ML-P-55110F GRP" at 8144.19,-1159.26 h40
  text "A" at 8864.19,-1159.26 h50
  text "B" at 9214.19,-1159.26 h50
  text "IPC CLASS:" at 9449.19,-1159.26 h50
  text "1" at 10059.19,-1159.26 h50
  text "2" at 10309.19,-1159.26 h50
  text "3" at 10559.19,-1159.26 h50
  text "QUALITY RELEASE REPORT" at 8164.19,-1279.26 h50
  text "OTHER" at 9759.19,-1279.26 h50
  text "PER ORDER" at 10094.19,-1284.26 h50
  text "X" at 9654.19,-1289.26 h60
  text "NONE" at 8164.19,-1399.26 h50
  text "REQUIRED" at 8864.19,-1399.26 h50
  text "PER ORDER" at 9764.19,-1399.26 h50
  text "ELECTRICAL TEST:" at 6449.19,-1404.26 h60
  text "X" at 8759.19,-1404.26 h60
  text "Mechanical 11 Layer: File and PCB Ordering Information" at 3110,-1410 h150
  text "NONE" at 8164.19,-1519.26 h50
  text "1 SIDE" at 8859.19,-1519.26 h45
  text "2 SIDES" at 9299.19,-1519.26 h45
  text "MIN. PITCH" at 9759.19,-1519.26 h50
  text "0.65mm" at 10294.19,-1519.26 h50
  text "SURFACE MOUNT:" at 6449.19,-1524.26 h60
  text "X" at 9211.2,-1527.25 h60
  text "NONE" at 8164.19,-1639.26 h50
  text "FOIL" at 8864.19,-1639.26 h50
  text "LEGEND" at 9314.19,-1639.26 h50
  text "REFER" at 9759.19,-1639.26 h50
  text "MANUFACTURER'S ID/LOGO:" at 6449.19,-1644.26 h60
  text "ISO9001/AS3901" at 8314.19,-1759.26 h50
  text "NONE" at 9759.19,-1759.26 h50
  text "MANUFACTURER'S ACCREDITATION:" at 6449.19,-1764.26 h60
  text "X" at 8209.19,-1764.26 h60
  text "PER ORDER" at 8164.19,-1879.26 h50
  text "REFER" at 8864.19,-1879.26 h50
  text "PACKAGING AND HANDLING:" at 6449.19,-1884.26 h60
  text "X" at 8059.19,-1889.26 h60
Mechanical 12:
  drawing of 1529 lines, arcs and shapes, not listed
Drill Drawing:
  text ".legend" at -1255,3080 h60

## Text inside footprints (layer, text, board x,y; h text height)
CANADAFLAG1: Top Overlay "Made in Canada" at 449,963 h93